# Altium PCB Copy of Dev_BRD_STM32F030K6T6_ширина20.PcbDoc
Units mm, origin at the board's own origin, x right, y up, seen from the top; angles counter-clockwise.
Board outline 35 x 20 mm, 2 copper layers (Top Layer, Bottom Layer); 49 components, 33 nets, 107 pads, 43 vias.
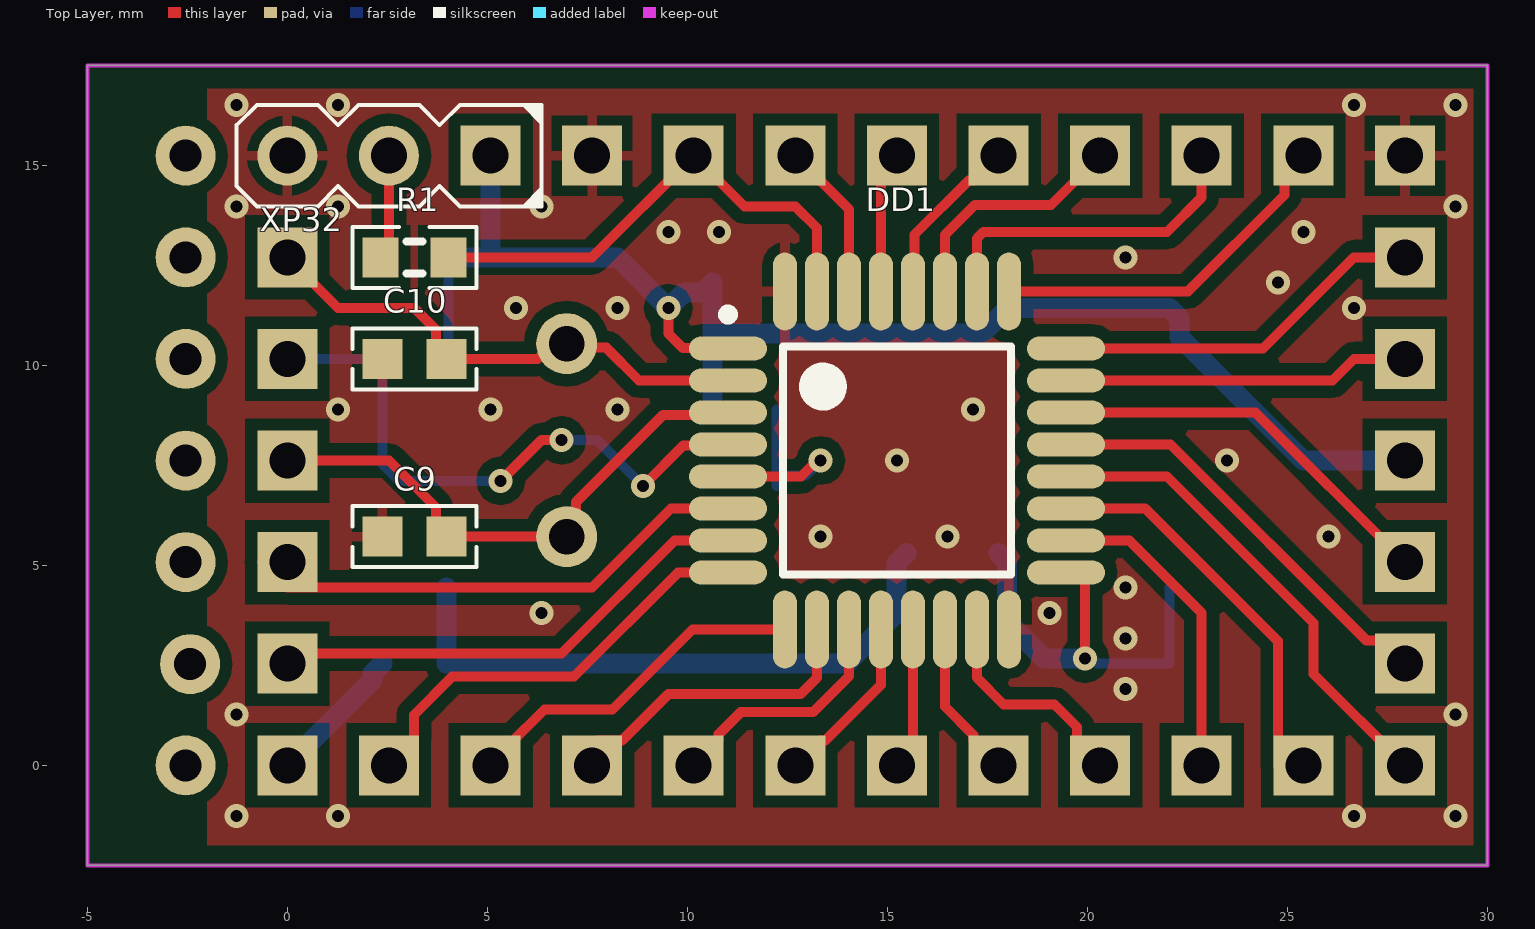
[diagram p0: Top Layer view]
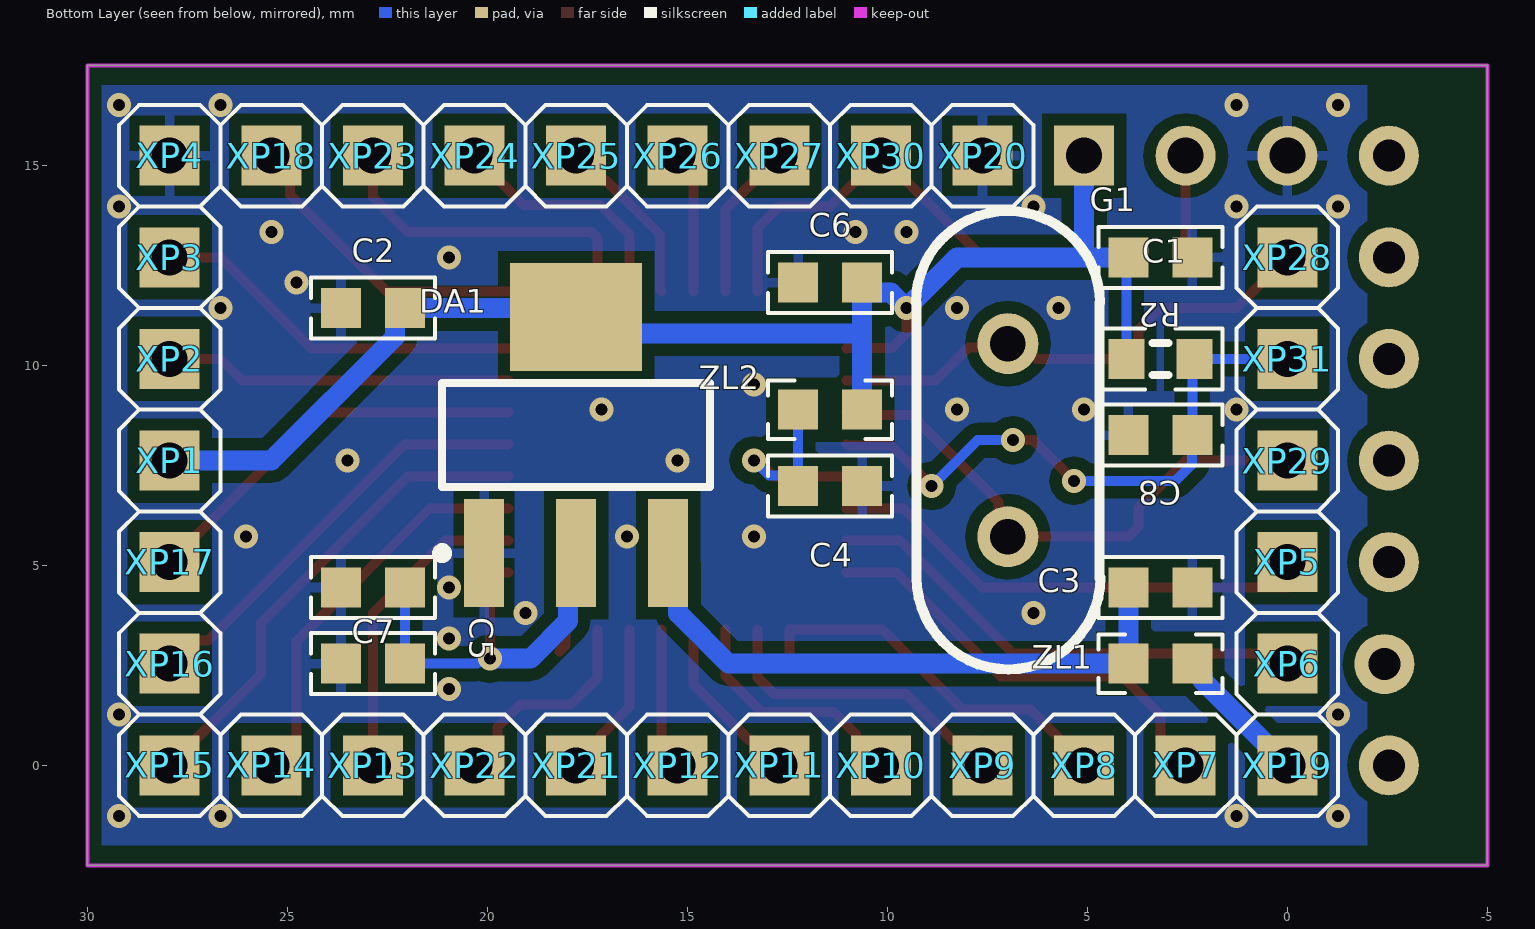
[diagram p1: Bottom Layer view, seen from below]

## Layer stack, top to bottom
Top Solder: solder mask 0.0102, Solder Resist, Dk 3.5
Top Layer: signal copper 0.0356
Dielectric 1: dielectric 0.32, FR-4, Dk 4.8
Bottom Layer: signal copper 0.0356
Bottom Solder: solder mask 0.0102, Solder Resist, Dk 3.5

## Board outline
-5,-2.5 -5,17.5 30,17.5 30,-2.5

## Design rules (kind name [scope] priority, off if disabled: settings)
Clearance Clearance_1 [InPoly] p1: gap=0.3 ignorepadtopadclearanceinfootprint=TRUE except(0: Arc-Hole Track-Hole SMDPad-Hole THPad-Hole Via-Hole Fill-Hole Poly-Hole Region-Hole Text-Hole)
Clearance [All] p2: gap=0.2 ignorepadtopadclearanceinfootprint=TRUE except(0: Arc-Hole Track-Hole SMDPad-Hole THPad-Hole Via-Hole Fill-Hole Poly-Hole Region-Hole Text-Hole)
PolygonConnect [All] p1: thpad.connectstyle=Relief thpad.reliefconductorwidth=0.254 thpad.reliefentries=4 thpad.polygonreliefangle="90 Angle" thpad.airgapwidth=0.254 smdpad.connectstyle=Relief smdpad.reliefconductorwidth=0.254 smdpad.reliefentries=4 smdpad.polygonreliefangle="90 Angle" smdpad.airgapwidth=0.254 via.connectstyle=Direct via.reliefconductorwidth=0.254 via.reliefentries=4 via.polygonreliefangle="90 Angle" via.airgapwidth=0.254
RoutingVias [All] p1: holewidth=0.5 width=0.8 viastyle="Through Hole" minholewidth=0.3 minwidth=0.6 maxholewidth=0.8 maxwidth=1.2
SolderMaskExpansion [All] p1: expansion=0.102 istentingtop=FALSE
Width [All] p1: maxlimit=0.5 minlimit=0.15 preferedwidth=0.25
30 further rules are at their usual default settings.

## Components (designator, comment, footprint, x,y, rotation, side; value= is the part's Value field where it differs from the comment)
C1 "100n" CAPC1608(0603)N 3.175,12.7 r180 bottom
C2 "10u" CAPC1608(0603)N 22.86,11.43 r180 bottom
C3 "10u" CAPC1608(0603)N 3.175,4.445 r0 bottom
C4 "100n" CAPC1608(0603)N 11.43,6.985 r0 bottom
C5 "100n" CAPC1608(0603)N 22.86,2.54 r180 bottom
C6 "100n" CAPC1608(0603)N 11.43,12.065 r180 bottom
C7 "10u" CAPC1608(0603)N 22.86,4.445 r180 bottom
C8 "100n" CAPC1608(0603)N 3.175,8.255 r180 bottom
C9 "12p" CAPC1608(0603)N 3.175,5.715 r0 top
C10 "12p" CAPC1608(0603)N 3.175,10.16 r0 top
DA1 "LD1117S33T" SOT223_M 17.78,8.255 r90 bottom
DD1 "STM32F030K6T6" STM-LQFP32_M 15.24,7.62 r0 top
G1 "8MHz" HC-49/S 6.985,5.715 r90 bottom
R1 "100k" RESC1608(0603)N 3.175,12.7 r180 top
R2 "10k" RESC1608(0603)N 3.175,10.16 r0 bottom
XP1 "PLS-1" PLS-1-3D 27.94,7.62 r90 bottom
XP2 "PLS-1" PLS-1-3D 27.94,10.16 r90 bottom
XP3 "PLS-1" PLS-1-3D 27.94,12.7 r90 bottom
XP4 "PLS-1" PLS-1-3D 27.94,15.24 r90 bottom
XP5 "PLS-1" PLS-1-3D 0,5.08 r180 bottom
XP6 "PLS-1" PLS-1-3D 0,2.54 r180 bottom
XP7 "PLS-1" PLS-1-3D 2.54,0 r180 bottom
XP8 "PLS-1" PLS-1-3D 5.08,0 r180 bottom
XP9 "PLS-1" PLS-1-3D 7.62,0 r180 bottom
XP10 "PLS-1" PLS-1-3D 10.16,0 r180 bottom
XP11 "PLS-1" PLS-1-3D 12.7,0 r180 bottom
XP12 "PLS-1" PLS-1-3D 15.24,0 r180 bottom
XP13 "PLS-1" PLS-1-3D 22.86,0 r180 bottom
XP14 "PLS-1" PLS-1-3D 25.4,0 r180 bottom
XP15 "PLS-1" PLS-1-3D 27.94,0 r180 bottom
XP16 "PLS-1" PLS-1-3D 27.94,2.54 r180 bottom
XP17 "PLS-1" PLS-1-3D 27.94,5.08 r180 bottom
XP18 "PLS-1" PLS-1-3D 25.4,15.24 r180 bottom
XP19 "PLS-1" PLS-1-3D 0,0 r90 bottom
XP20 "PLS-1" PLS-1-3D 7.62,15.24 r180 bottom
XP21 "PLS-1" PLS-1-3D 17.78,0 r180 bottom
XP22 "PLS-1" PLS-1-3D 20.32,0 r180 bottom
XP23 "PLS-1" PLS-1-3D 22.86,15.24 r180 bottom
XP24 "PLS-1" PLS-1-3D 20.32,15.24 r180 bottom
XP25 "PLS-1" PLS-1-3D 17.78,15.24 r180 bottom
XP26 "PLS-1" PLS-1-3D 15.24,15.24 r90 bottom
XP27 "PLS-1" PLS-1-3D 12.7,15.24 r180 bottom
XP28 "PLS-1" PLS-1-3D 0,12.7 r90 bottom
XP29 "PLS-1" PLS-1-3D 0,7.62 r90 bottom
XP30 "PLS-1" PLS-1-3D 10.16,15.24 r90 bottom
XP31 "PLS-1" PLS-1-3D 0,10.16 r90 bottom
XP32 "PLS-3" PLS-3-3D 5.08,15.24 r180 top
ZL1 "100u" INDC1608(0603)N 3.175,2.54 r0 bottom
ZL2 "100u" INDC1608(0603)N 11.43,8.89 r0 bottom

## Footprints (in the part's own frame and the unit in brackets; to place one, negate y for a bottom-side part, rotate by r counter-clockwise, add the part's x,y. Pads: shape width x height; smd on the part's side, far side on the other; paste and mask are expansions set on the pad)
CAPC1608(0603)N [mm] "Chip Capacitor, Body 1.6x0.8mm, IPC Medium Density"
  rect 1x1 smd: 1(-0.8,0) 2(0.8,0)
  silkscreen extent -1.55,-0.76 1.55,0.76, body extent -0.8,-0.4 0.8,0.4, height 0.3
HC-49/S [mil]
  round 60 hole 35: 1(0,0) 2(190,0)
  silkscreen extent -131,-91 321,91, body extent -128,-92 318,92, height 142
INDC1608(0603)N [mm] "Chip Inductor, Body 1.6x0.8mm, IPC Medium Density"
  rect 1x1 smd: 1(-0.8,0) 2(0.8,0)
  silkscreen extent -1.55,-0.74 1.55,0.74, body extent -0.87,-0.48 0.87,0.48, height 0.71
PLS-1-3D [mm] "Connector; Header; 1 Position"
  rect 1.5x1.5 hole 0.9: 1(0,0)
  silkscreen extent -1.27,-1.27 1.27,1.27, body extent -1.27,-1.27 1.27,1.27, height 8.44
PLS-3-3D [mm] "Connector; Header; 3 Position"
  rect 1.5x1.5 hole 0.9: 1(0,0)
  round 1.5 hole 0.9: 2(2.54,0) 3(5.08,0)
  silkscreen extent -1.27,-1.27 6.35,1.27, body extent -1.27,-1.27 6.35,1.27, height 8.44
RESC1608(0603)N [mm] "Chip Resistor, Body 1.6x0.8mm, IPC Medium Density"
  rect 0.9x1 smd: 1(-0.85,0) 2(0.85,0)
  silkscreen extent -1.55,-0.76 1.55,0.76, body extent -0.8,-0.4 0.8,0.4, height 0.3
SOT223_M [mm] "SOT223, 4-Leads, Body 6.5x3.5mm, Pitch 2.3mm, Lead Span 7mm, IPC Low Density"
  rect 2.7x1 smd: 1(-2.95,2.3) 2(-2.95,0) 3(-2.95,-2.3)
  rect 2.7x3.3 smd: 4(2.95,0)
  silkscreen extent -3.07,-3.35 1.3,3.48, body extent -3.65,-3.35 3.65,3.35, height 1.7
STM-LQFP32_M [mm] "QFP, 32-Leads, Body 7x7mm, Pitch 0.8mm, IPC Low Density"
  oval 1.95x0.6 smd: 1(-4.225,2.8) 2(-4.225,2) 3(-4.225,1.2) 4(-4.225,0.4) 5(-4.225,-0.4) 6(-4.225,-1.2) 7(-4.225,-2) 8(-4.225,-2.8) 17(4.225,-2.8) 18(4.225,-2) 19(4.225,-1.2) 20(4.225,-0.4) 21(4.225,0.4) 22(4.225,1.2) 23(4.225,2) 24(4.225,2.8)
  oval 0.6x1.95 smd: 9(-2.8,-4.225) 10(-2,-4.225) 11(-1.2,-4.225) 12(-0.4,-4.225) 13(0.4,-4.225) 14(1.2,-4.225) 15(2,-4.225) 16(2.8,-4.225) 25(2.8,4.225) 26(2,4.225) 27(1.2,4.225) 28(0.4,4.225) 29(-0.4,4.225) 30(-1.2,4.225) 31(-2,4.225) 32(-2.8,4.225)
  silkscreen extent -4.35,-2.85 2.85,3.77, body extent -3.5,-3.5 3.5,3.5, height 1.6

## Part data
C1 C2 C3 C4 C5 C6 C7 C8 C9 C10: library part CAPC1608(0603), "?", Digi-Key Part Number=?, HelpURL=?, Manufacturer Part Number=?, Note=?, Package=?, Part Number=CAPC1608(0603), Price$=?
DA1: "LDO Voltage Regulators 3.3V 0.8A Positive", Digi-Key Part Number=?, HelpURL=http://www.mouser.com/ds/2/389/CD00000544-310772.pdf, Manufacturer Part Number=?, Note=?, Package=?, Part Number=LD1117S33T, Price$=?
DD1: "ARM Microcontrollers - MCU Entry-level ARM Cortex-M0 Value MCU", I/Os (High Current)=26, Mouser Part Number=511-STM32F030K6T6, Operating Frequency(F) (Processor speed) (MHz)=48, Package=LQFP-32, Supplier Part Number 1=497-14046-ND, Supply Voltage(Vcc) min (V)=2.4, ComponentLink1Description="Manufacturer URL", ComponentLink1URL=http://www.st.com/web/en/home.html, ComponentLink2Description=Datasheet, ComponentLink2URL=http://www.st.com/st-web-ui/static/active/en/resource/technical/document/datasheet/DM00088500.pdf, ComponentLink3Description="Package Specification", ComponentLink3URL=http://www.st.com/st-web-ui/static/active/en/resource/technical/document/datasheet/DM00088500.pdf, Core="ARM Cortex-M0", DatasheetVersion="Rev. 1", FLASH Size (Prog) (kB)=32, HelpURL=https://eu.mouser.com/ProductDetail/STMicroelectronics/STM32F030K6T6?qs=eyrSuY1LhL2nYlb0JDdrAA%3D%3D, Internal RAM Size (kB)=4, Manufacturer Part Number=STM32F030K6T6, Mounting Technology="Surface Mount", PackageDescription="32-Pin Low Profile Quad Flat Package, 7 x 7 mm Body, 0.8 mm Pitch", PackageReference=LQFP32, PackageVersion="Rev. 1, 07/2013", Packing=Tray, Part Number=STM32F030K6T6, PartNumber=STM32F030K6T6, Price$=https://eu.mouser.com/ProductDetail/STMicroelectronics/STM32F030K6T6?qs=eyrSuY1LhL2nYlb0JDdrAA%3D%3D, Supplier 1=Digi-Key, Supplier 2=Newark, Supplier 3=Mouser, Supplier Part Number 2=19X6194, Supplier Part Number 3=511-STM32F030K6T6
G1: library part "Crystal HC-49/S", "Crystal HC-49/S", Part Number="Crystal HC-49/S"
R1 R2: library part RESC1608(0603), Digi-Key Part Number=???, HelpURL=???, Manufacturer Part Number=???, Note=???, Package=???, Part Number=RESC1608(0603), Price$=???
XP1 XP2 XP3 XP4 XP5 XP6 XP7 XP8 XP9 XP10 XP11 XP12 XP13 XP14 XP15 XP16 XP17 XP18 XP19 XP20 XP21 XP22 XP23 XP24 XP25 XP26 XP27 XP28 XP29 XP30 XP31: "CONN HEADER VERT 1POS", Digi-Key Part Number=S1011EC-01-ND, Manufacturer Part Number=PRPC001SAAN-RC, HelpURL=https://www.digikey.com/product-detail/en/sullins-connector-solutions/PRPC001SAAN-RC/S1011EC-01-ND/2775253, Note=???, Part Number=PLS-1, Price$=0.05
XP32: library part PR20203VBNN, "CONN HEADER VERT 3POS 2.54MM", Digi-Key Part Number=1849-1003-ND, Package="Header 3POS 2.54mm", HelpURL=https://www.digikey.com/product-detail/en/metz-connect-usa-inc/PR20203VBNN/1849-1003-ND/7794768, Manufacturer Part Number=PR20203VBNN, Part Number=PR20203VBNN
ZL1 ZL2: library part Ferite1608(0603), "ferite bead", Digi-Key Part Number=???, Manufacturer Part Number=???, Note=???, Package=???, Part Number=Ferite1608(0603), Price$=???

## Free pads (board coordinates)
  round 1.5 hole 0.8: 0(-2.54,0) 0(-2.54,5.08) 0(-2.54,7.62) 0(-2.54,10.16) 0(-2.54,12.7) 0(-2.54,15.24) 0(-2.429,2.531)

## Via types
v1: diameter 0.6, hole 0.3, Top Layer to Bottom Layer, tented both sides, 39 vias
v2: diameter 0.6, hole 0.3, Top Layer to Bottom Layer, 4 vias

## Nets (pads, with @x,y where several pads share a name; then routed paths per layer and width w, separated by ;. In a path a pad name is that pad's centre, name@x,y a point inside that pad or via, vN(x,y) a via of type N, cw(c..) or ccw(c..) an arc to the next point about the centre after c; other vN are vias at no path point)
+3.3V: C1.1 C2.2 C5.2 C6.2 C7.2 DA1.2 DA1.4 DD1.1 DD1.17 R2.2 XP1.1 XP32.1 ZL2.1 | length 47.8
  Top Layer w0.25: v1(9.525,11.43) 9.525,10.795 9.893,10.427 11.008,10.427 DD1.1 ; DD1.17 19.777,4.82 19.939,4.658 v1(19.939,2.667)
  Bottom Layer w0.25: R2.2 C1.1@4.025,12.485 ; v1(19.939,2.667) 20.006,2.6 20.2,2.6 20.26,2.54 C5.2 C7.2
  Bottom Layer w0.5: C1.1 5.08,12.7 8.255,12.7 v1(9.525,11.43) 9.91,11.815 10.38,11.815 C6.2 10.63,10.795 ; 5.08,12.865 XP32.1 ; ZL2.1 10.63,10.795 ; DA1.2 17.988,5.097 17.988,3.602 18.923,2.667 v1(19.939,2.667) ; XP1.1 25.4,7.62 22.31,10.71 22.31,11.18 C2.2 18.005,11.43 17.37,10.795 10.63,10.795
+5V: XP19.1 ZL1.1 | length 3.5
  Bottom Layer w0.5: XP19.1 2.125,2.125 2.125,2.29 ZL1.1
BOOT0: DD1.31 R1.1 XP30.1 | length 12.6
  Top Layer w0.25: R1.1 7.62,12.7 XP30.1 11.43,13.97 12.7,13.97 13.24,13.43 DD1.31
GND: C1.2 C2.1 C3.1 C4.1 C5.1 C6.1 C7.1 C8.1 C9.1 C10.1 DA1.1 DD1.16 DD1.32 XP4.1 XP20.1 XP32.3 | length 0.7
  Top Layer w0.25: DD1.32@12.373,11.912 DD1.32 ; DD1.16 18.04,3.007 DD1.16@18.202,2.845
  other v1: -1.27,-1.27 1.27,-1.27 26.67,-1.27 29.21,-1.27 -1.27,1.27 29.21,1.27 20.955,1.905 20.955,3.175 6.35,3.81 19.05,3.81 20.955,4.445 13.335,5.715 16.51,5.715 26.035,5.715 15.24,7.62 23.495,7.62 1.27,8.89 5.08,8.89 8.255,8.89 17.145,8.89 13.335,9.525 5.715,11.43 8.255,11.43 26.67,11.43 24.765,12.065 20.955,12.7 9.525,13.335 25.4,13.335 -1.27,13.97 1.27,13.97 6.35,13.97 29.21,13.97 -1.27,16.51 1.27,16.51 26.67,16.51 29.21,16.51
  other v2: 10.795,13.335
NetC3_2: C3.2 DA1.3 ZL1.2 | length 15.3
  Bottom Layer w0.5: C3.2 ZL1.2 13.97,2.54 15.23,3.8 15.23,5.055 DA1.3
NetC4_2: C4.2 DD1.5 ZL2.2 | length 5.8
  Top Layer w0.25: DD1.5 12.84,7.22 13.24,7.62 v1(13.335,7.62)
  Bottom Layer w0.25: ZL2.2 C4.2 12.489,7.244 12.959,7.244 v1(13.335,7.62)
NetC9_2: C9.2 DD1.3 G1.1 XP29.1 | length 13.7
  Top Layer w0.25: XP29.1 2.54,7.62 3.716,6.444 3.716,5.974 C9.2 G1.1 7.221,5.951 7.221,6.588 9.387,8.753 10.948,8.753 DD1.3
NetC10_2: C10.2 DD1.2 G1.2 XP28.1 | length 12.9
  Top Layer w0.25: XP28.1 1.27,11.43 3.175,11.43 3.716,10.889 3.716,10.419 C10.2 6.259,10.16 6.64,10.541 G1.2 7.087,10.439 7.976,10.439 8.795,9.62 DD1.2
NetDD1_6: DD1.6 XP5.1 | length 12.7
  Top Layer w0.25: XP5.1@-0.635,5.08 0,4.445 7.62,4.445 9.595,6.42 DD1.6
NetDD1_7: DD1.7 XP6.1 | length 12.3
  Top Layer w0.25: XP6.1 0.254,2.794 6.858,2.794 9.684,5.62 DD1.7
NetDD1_8: DD1.8 XP7.1 | length 10.8
  Top Layer w0.25: XP7.1 3.165,0.625 3.165,1.26 4.122,2.217 7.17,2.217 9.773,4.82 DD1.8
NetDD1_9: DD1.9 XP8.1 | length 8.8
  Top Layer w0.25: XP8.1@5.538,0.508 6.427,1.397 8.128,1.397 10.126,3.395 DD1.9 DD1.9@12.44,2.72
NetDD1_10: DD1.10 XP9.1 | length 7.9
  Top Layer w0.25: XP9.1@7.366,0.254 7.737,0.625 8.372,0.625 9.525,1.778 12.827,1.778 13.24,2.191 DD1.10
NetDD1_11: DD1.11 XP10.1 | length 5.7
  Top Layer w0.25: XP10.1@10.414,0.254 10.785,0.625 10.785,0.779 11.334,1.328 13.139,1.328 14.04,2.229 14.04,2.539 DD1.11
NetDD1_12: DD1.12 XP11.1 | length 4.1
  Top Layer w0.25: XP11.1@12.954,0.127 12.954,0.254 13.325,0.625 13.452,0.625 14.84,2.013 DD1.12
NetDD1_13: DD1.13 XP12.1 | length 3.4
  Top Layer w0.25: XP12.1@15.367,0.127 15.64,0.4 DD1.13
NetDD1_14: DD1.14 XP21.1 | length 3.9
  Top Layer w0.25: DD1.14 16.44,1.467 17.155,0.752 17.155,0.625 17.653,0.127 XP21.1@17.78,0.127
NetDD1_15: DD1.15 XP22.1 | length 5.4
  Top Layer w0.25: DD1.15 17.24,2.191 17.907,1.524 19.177,1.524 19.745,0.956 19.745,0.575 XP22.1
NetDD1_18: DD1.18 XP13.1 | length 8
  Top Layer w0.25: DD1.18 21.05,5.62 22.86,3.81 XP13.1
NetDD1_19: DD1.19 XP14.1 | length 9.8
  Top Layer w0.25: DD1.19 21.448,6.42 24.765,3.103 XP14.1@24.765,0
NetDD1_20: DD1.20 XP15.1 | length 12.2
  Top Layer w0.25: DD1.20 21.99,7.22 25.654,3.556 25.654,2.286 XP15.1
NetDD1_21: DD1.21 XP16.1 | length 10.7
  Top Layer w0.25: DD1.21 22.079,8.02 26.984,3.115 27.365,3.115 XP16.1
NetDD1_22: DD1.22 XP17.1 | length 10
  Top Layer w0.25: DD1.22 24.2,8.82 XP17.1
NetDD1_25: DD1.25 XP18.1 | length 9.1
  Top Layer w0.25: DD1.25 22.513,11.845 24.929,14.261 24.929,14.769 XP18.1
NetDD1_26: DD1.26 XP23.1 | length 8.4
  Top Layer w0.25: DD1.26 17.24,13.175 17.4,13.335 21.993,13.335 22.86,14.202 XP23.1
NetDD1_27: DD1.27 XP24.1 | length 6.1
  Top Layer w0.25: DD1.27 16.44,13.264 17.186,14.01 19.09,14.01 XP24.1
NetDD1_28: DD1.28 XP25.1 | length 4.4
  Top Layer w0.25: DD1.28 15.68,11.885 15.68,13.267 17.028,14.615 17.155,14.615 XP25.1
NetDD1_29: DD1.29 XP26.1 | length 3.6
  Top Layer w0.25: DD1.29 14.84,14.84 XP26.1
NetDD1_30: DD1.30 XP27.1 | length 4
  Top Layer w0.25: XP27.1 14.04,13.9 DD1.30
NetR1_2: R1.2 XP32.2 | length 2.6
  Top Layer w0.25: R1.2 2.54,12.915 XP32.2
nRST: C8.2 DD1.4 R2.1 XP31.1 | length 15.1
  Top Layer w0.25: v2(5.334,7.112) 6.35,8.128 v2(6.858,8.128) ; v2(8.89,6.985) 9.905,8 10.995,8 DD1.4
  Bottom Layer w0.25: XP31.1 R2.1 2.375,10.11 C8.2 2.38,8.25 2.38,7.526 2.794,7.112 v2(5.334,7.112) ; v2(6.858,8.128) 7.747,8.128 v2(8.89,6.985)
SWDCLK: DD1.24 XP3.1 | length 9.4
  Top Layer w0.25: DD1.24 24.39,10.42 26.67,12.7 XP3.1
SWDIO: DD1.23 XP2.1 | length 8.7
  Top Layer w0.25: DD1.23 26.13,9.62 26.67,10.16 XP2.1

## Polygon pours and split planes (outlines as drawn)
no net on Top Layer "NONET_L01_P008" (solid, remove dead copper, pour order 8): 21.59,19.05
GND on Top Layer "GND_L01_P005" (solid, remove dead copper, pour order 5): -2,16.92 30,16.92 30,-2 -2,-2
GND on Bottom Layer "GND_L02_P004" (solid, remove dead copper, pour order 4): -2,17 30,17 30,-2 -2,-2

## Keep-outs
Keep-Out Layer:
  the board outline again, w0.1

## Dimensions
30,17.5 to 30,-2.5 on Dimensions
-5,17.5 to 30,17.5 on Dimensions